# Allegro board KSZ_02v3.brd
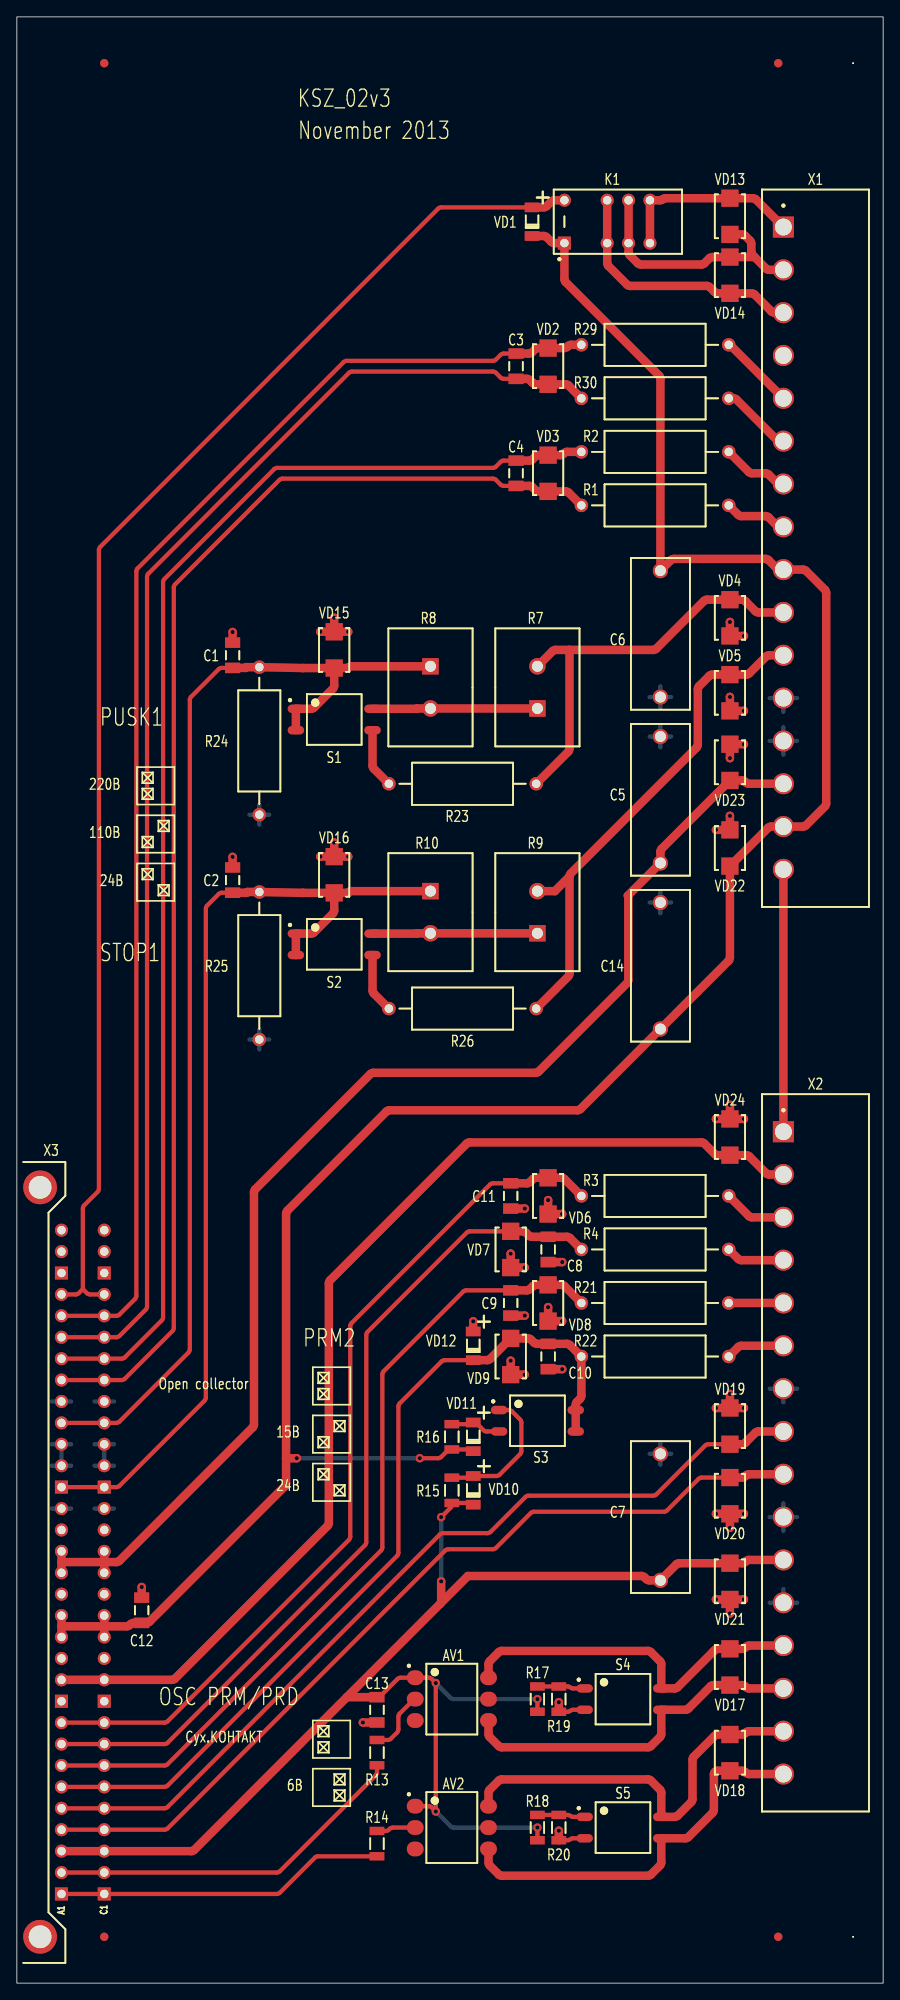
[diagram p0: board, top side]
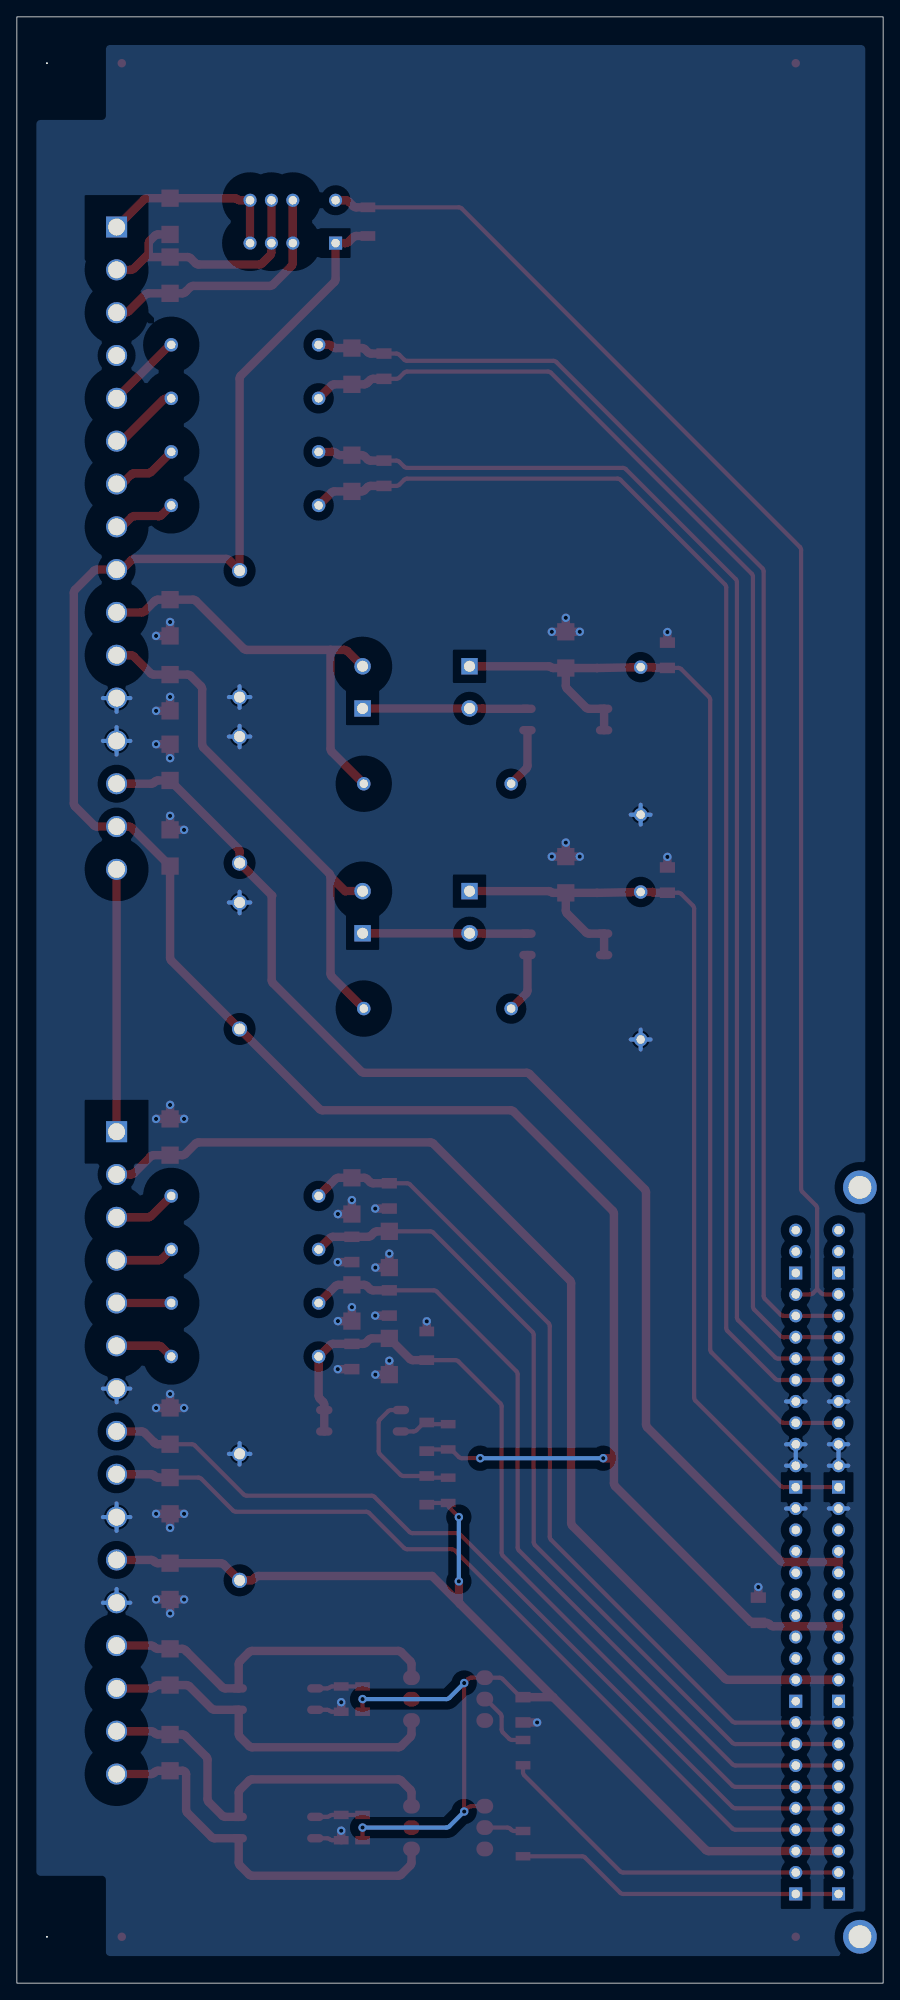
[diagram p1: board, bottom side, seen from below]

Outline 102.87 x 233.25 mm; copper layers: TOP, BOTTOM. Coordinates in mm from the lower left corner of the outline.
Outline path: rectangle 0,0 102.87,233.25

## Design rules (mm)
net group GNDK: nets GNDK
net group OUT: nets 1#RPS_C 1#RPS_NC 1#RPS_NO 1BI+ 1BI- 1MAN2 1MAN+ 1MAN- 1O_PRD+ 1O_PRD- 1O_PRM+ 1O_PRM- 1PRM2 1PUSK1 1PUSK2 1RZ-3 1STOP1 1STOP2

## Placement (name value [footprint] x y rotation side)
AV1  G3VM-351E  [SOIC254P978X342-6N]  51.66 33.69 0 top
AV2  G3VM-351E  [SOIC254P978X342-6N]  51.66 18.45 0 top
C1  0.1u  [CAPC3216X145N]  25.62 157.52 90 top
C2  0.1u  [CAPC3216X145N]  25.62 130.85 90 top
C3  1000p  [CAPC3216X95N]  59.28 191.81 270 top
C4  100p  [CAPC3216X70N]  59.28 179.11 270 top
C5  0.22u  [CAPRR1500W80L1800T700H1250P]  76.42 140.37 90 top
C6  0.22u  [CAPRR1500W80L1800T700H1250P]  76.42 160.06 270 top
C7  0.22u  [CAPRR1500W80L1800T700H1250P]  76.42 55.28 90 top
C8  1000p  [CAPC3216X95N]  63.09 87.03 270 top
C9  1000p  [CAPC3216X95N]  58.64 80.68 270 top
C10  1000p  [CAPC3216X95N]  63.09 74.33 270 top
C11  1000p  [CAPC3216X95N]  58.64 93.38 270 top
C12  0.1u  [CAPC3216X145N]  14.83 44.23 90 top
C13  0.1u  [CAPC3216X145N]  42.77 32.42 270 top
C14  0.22u  [CAPRR1500W80L1800T700H1250P]  76.42 120.69 90 top
K1  FX2  [RELAY_FX2]  71.34 208.95 90 top
NOREF  -  [unnamed]  10.38 5.5 0 top
NOREF#2  -  [unnamed]  90.41 5.5 0 top
NOREF#3  -  [unnamed#2]  99.3 227.75 0 top
NOREF#4  -  [unnamed#2]  99.3 5.5 0 top
NOREF#5  -  [unnamed]  90.41 227.75 0 top
NOREF#6  -  [unnamed]  10.38 227.75 0 top
R1  100k  [RESAD1750W68L12000D500P]  75.79 175.3 0 top
R2  100k  [RESAD1750W68L12000D500P]  75.79 181.65 0 top
R3  1k  [RESAD1750W68L12000D500P]  75.79 93.38 0 top
R4  1k  [RESAD1750W68L12000D500P]  75.79 87.03 0 top
R7  5.1k  [RESV500P1300W900L2500H]  61.82 153.71 90 top
R8  5.1k  [RESV500P1300W900L2500H]  49.12 153.71 270 top
R9  5.1k  [RESV500P1300W900L2500H]  61.82 127.04 90 top
R10  5.1k  [RESV500P1300W900L2500H]  49.12 127.04 270 top
R13  4.7k  [RESC3116X65N]  42.77 27.34 90 top
R14  4.7k  [RESC3116X65N]  42.77 16.55 90 top
R15  2.2k  [RESC3116X65N]  51.66 58.46 90 top
R16  4.7k  [RESC3116X65N]  51.66 64.81 90 top
R17  2.2k  [RESC3116X65N]  61.82 33.69 90 top
R18  2.2k  [RESC3116X65N]  61.82 18.45 90 top
R19  1.5k  [RESC3116X65N]  64.36 33.69 90 top
R20  1.5k  [RESC3116X65N]  64.36 18.45 90 top
R21  1k  [RESAD1750W68L12000D500P]  75.79 80.68 0 top
R22  10  [RESAD1750W68L12000D500P]  75.79 74.33 0 top
R23  430  [RESAD1750W68L12000D500P]  52.93 142.28 0 top
R24  750  [RESAD1750W68L12000D500P]  28.8 147.36 90 top
R25  750  [RESAD1750W68L12000D500P]  28.8 120.69 90 top
R26  430  [RESAD1750W68L12000D500P]  52.93 115.61 0 top
R29  10k  [RESAD1750W68L12000D500P]  75.79 194.35 0 top
R30  10k  [RESAD1750W68L12000D500P]  75.79 188 0 top
S1  SmWDL-02  [SW_SMWDL-02]  37.69 149.9 0 top
S2  SmWDL-02  [SW_SMWDL-02]  37.69 123.23 0 top
S3  SmWDL-02  [SW_SMWDL-02]  61.82 66.71 0 top
S4  SmWDL-02  [SW_SMWDL-02]  71.98 33.69 0 top
S5  SmWDL-02  [SW_SMWDL-02]  71.98 18.45 0 top
VD1  LL4148  [DIOMELF3515N]  61.18 208.95 90 top
VD2  6.8B  [DIOM5236X261N_NP]  63.09 191.81 270 top
VD3  6.8B  [DIOM5236X261N_NP]  63.09 179.11 270 top
VD4  300B  [DIOM5236X261N_NP]  84.68 161.96 270 top
VD5  300B  [DIOM5236X261N_NP]  84.68 153.07 270 top
VD6  30B  [DIOM5236X261N_NP]  63.09 93.38 270 top
VD7  30B  [DIOM5236X261N_NP]  58.64 87.03 270 top
VD8  30B  [DIOM5236X261N_NP]  63.09 80.68 270 top
VD9  30B  [DIOM5236X261N_NP]  58.64 74.33 270 top
VD10  LL4148  [DIOMELF3515N]  54.2 58.46 90 top
VD11  LL4148  [DIOMELF3515N]  54.2 64.81 90 top
VD12  LL4148  [DIOMELF3515N]  54.2 75.6 90 top
VD13  300B  [DIOM5236X261N_NP]  84.68 209.59 270 top
VD14  300B  [DIOM5236X261N_NP]  84.68 202.6 270 top
VD15  30B  [DIOM5236X261N_NP]  37.69 158.15 90 top
VD16  30B  [DIOM5236X261N_NP]  37.69 131.48 90 top
VD17  300B  [DIOM5236X261N_NP]  84.68 37.5 270 top
VD18  300B  [DIOM5236X261N_NP]  84.68 27.34 270 top
VD19  30B  [DIOM5236X261N_NP]  84.68 66.08 90 top
VD20  30B  [DIOM5236X261N_NP]  84.68 57.82 270 top
VD21  30B  [DIOM5236X261N_NP]  84.68 47.66 270 top
VD22  30B  [DIOM5236X261N_NP]  84.68 134.66 90 top
VD23  300B  [DIOM5236X261N_NP]  84.68 144.82 90 top
VD24  300B  [DIOM5236X261N_NP]  84.68 100.37 90 top
X1  231-576/001-000  [WAGO_231_576_001_000]  94.84 170.22 0 top
X2  231-576/001-000  [WAGO_231_576_001_000]  94.84 62.9 0 top
X3  DIN-32x2  [DIN_41612_64_MR]  2.12 49.95 0 top

## Library data of the parts
AV1 AV2 = OPTO_RELAY_1: alternate symbols: (SOIC254P978X342-6M)
C1-C14 = CAP_NP
K1 = RELAY_FX2
R1-R4 R21-R26 R29 R30 = RES_1W: alternate symbols: (RESADV375W68L1200D500P)
R7-R10 = RES_5W
R13-R20 = RES_0.25W
S1-S5 = SWITCH_2
VD1 VD10-VD12 = DIODE
VD2-VD9 VD13-VD24 = DIODE_TVS_BI
X1 X2 = CON_16
X3 = CON_32x2

## Footprints (pads in the part's own frame, mm; a bottom-side part is the same pattern mirrored in y, then rotated)
CAPC3216X70N
  rect 1.25x1.8 smd: 1(-1.5,0) 2(1.5,0)
CAPC3216X95N
  rect 1.25x1.8 smd: 1(-1.5,0) 2(1.5,0)
CAPC3216X145N
  rect 1.25x1.8 smd: 1(-1.5,0) 2(1.5,0)
CAPRR1500W80L1800T700H1250P
  round 1.8 hole 1.3: 1(-7.5,0) 2(7.5,0)
DIN_41612_64_MR
  rect 1.55x1.55 hole 1: A1(3.175,-39.37) A10(3.175,-16.51) A20(3.175,8.89) A30(3.175,34.29) C1(8.255,-39.37) C10(8.255,-16.51) C20(8.255,8.89) C30(8.255,34.29)
  round 1.55 hole 1: A2(3.175,-36.83) A3(3.175,-34.29) A4(3.175,-31.75) A5(3.175,-29.21) A6(3.175,-26.67) A7(3.175,-24.13) A8(3.175,-21.59) A9(3.175,-19.05) A11(3.175,-13.97) A12(3.175,-11.43) A13(3.175,-8.89) A14(3.175,-6.35) A15(3.175,-3.81) A16(3.175,-1.27) A17(3.175,1.27) A18(3.175,3.81) A19(3.175,6.35) A21(3.175,11.43) A22(3.175,13.97) A23(3.175,16.51) A24(3.175,19.05) A25(3.175,21.59) A26(3.175,24.13) A27(3.175,26.67) A28(3.175,29.21) A29(3.175,31.75) A31(3.175,36.83) A32(3.175,39.37) C2(8.255,-36.83) C3(8.255,-34.29) C4(8.255,-31.75) C5(8.255,-29.21) C6(8.255,-26.67) C7(8.255,-24.13) C8(8.255,-21.59) C9(8.255,-19.05) C11(8.255,-13.97) C12(8.255,-11.43) C13(8.255,-8.89) C14(8.255,-6.35) C15(8.255,-3.81) C16(8.255,-1.27) C17(8.255,1.27) C18(8.255,3.81) C19(8.255,6.35) C21(8.255,11.43) C22(8.255,13.97) C23(8.255,16.51) C24(8.255,19.05) C25(8.255,21.59) C26(8.255,24.13) C27(8.255,26.67) C28(8.255,29.21) C29(8.255,31.75) C31(8.255,36.83) C32(8.255,39.37)
  round 4 hole 2.7: HOLE1(0.635,-44.45) HOLE2(0.635,44.45)
DIOM5236X261N_NP
  rect 2.05x2.05 smd: A(2.15,0) C(-2.15,0)
DIOMELF3515N
  rect 1.15x1.75 smd: A(1.7,0) C(-1.7,0)
RELAY_FX2
  rect 1.55x1.55 hole 1: 1(-2.54,6.32)
  round 1.55 hole 1: 3(-2.54,1.24) 4(-2.54,-1.3) 5(-2.54,-3.84) 6(2.54,-3.84) 7(2.54,-1.3) 8(2.54,1.24) 10(2.54,6.32)
RESAD1750W68L12000D500P
  round 1.6 hole 1: 1(-8.75,0) 2(8.75,0)
RESC3116X65N
  rect 1x1.75 smd: 1(-1.5,0) 2(1.5,0)
RESV500P1300W900L2500H
  rect 1.95x1.95 hole 1.3: 1(-2.5,0)
  round 1.95 hole 1.3: 2(2.5,0)
SOIC254P978X342-6N
  oval 2x1.75 smd: 1(-4.35,2.54) 2(-4.35,0) 3(-4.35,-2.54) 4(4.35,-2.54) 5(4.35,0) 6(4.35,2.54)
SW_SMWDL-02
  oval 1.95x1 smd: 1(-4.55,1.27) 2(-4.55,-1.27) 3(4.55,-1.27) 4(4.55,1.27)
unnamed
  round 1 smd: (0,0)
unnamed#2
  round 0.2 hole 2.7 unplated: (0,0)
WAGO_231_576_001_000
  rect 2.5x2.5 hole 2: 1(-3.81,38.1)
  round 2.5 hole 2: 2(-3.81,33.02) 3(-3.81,27.94) 4(-3.81,22.86) 5(-3.81,17.78) 6(-3.81,12.7) 7(-3.81,7.62) 8(-3.81,2.54) 9(-3.81,-2.54) 10(-3.81,-7.62) 11(-3.81,-12.7) 12(-3.81,-17.78) 13(-3.81,-22.86) 14(-3.81,-27.94) 15(-3.81,-33.02) 16(-3.81,-38.1)

## Nets
GNDK: C1.2 C2.2 C5.2 C6.2 C7.2 C8.2 C9.2 C10.2 C11.2 C12.2 C13.2 C14.2 R19.1 R20.1 R24.1 R25.1 S4.2(N) S5.2(N) VD4.A VD5.A VD6.A VD7.A VD8.A VD9.A VD12.A VD15.A VD16.A VD19.A VD20.A VD21.A VD22.A VD23.A VD24.A X1.12 X1.13 X2.7 X2.10 X2.12 X3.A19 X3.A21 X3.A22 X3.A24 X3.C19 X3.C21 X3.C22 X3.C24
1#RPS_C: K1.4(01) K1.7(02) VD13.A VD14.C X1.2
1#RPS_NC: K1.3(NC1) K1.8(NC2) VD14.A X1.3
1#RPS_NO: K1.5(NO1) K1.6(NO2) VD13.C X1.1
1BI+: R29.2 X1.5
1BI-: R30.2 X1.6
1MAN2: R21.2 X2.5
1MAN+: R2.2 X1.7
1MAN-: R1.2 X1.8
1O_PRD+: AV2.6 S5.4(ON) VD18.C X2.15
1O_PRD-: AV2.4 S5.3(ON) VD18.A X2.16
1O_PRM+: AV1.6 S4.4(ON) VD17.C X2.13
1O_PRM-: AV1.4 S4.3(ON) VD17.A X2.14
1PRM2: R22.2 X2.6
1PUSK1: R7.2 R23.2 VD4.C X1.10
1PUSK2: R3.2 X2.3
1RZ-3: X1.16 X2.1
1STOP1: R9.2 R26.2 VD5.C X1.11
1STOP2: R4.2 X2.4
#RPS: K1.10(IN-) VD1.A X3.A29 X3.C29
+15BK: AV1.1 AV2.1 C7.1 C13.1 R15.1 R17.1 R18.1 VD10.C VD21.C X2.11 X3.A3 X3.C3
+24BK: C6.1 C12.1 C14.1 K1.1(IN+) R16.1 VD1.C VD11.C VD22.C X1.9 X1.15 X3.A13 X3.A14 X3.C13 X3.C14
+100BK: C5.1 VD23.C X1.14 X3.A16 X3.A17 X3.C16 X3.C17
+BI: C3.1 R29.1 VD2.C X3.A28 X3.C28
+MAN: C4.1 R2.1 VD3.C X3.A26 X3.C26
+ZPR: VD19.C X2.8 X3.A5 X3.C5
-BI: C3.2 R30.1 VD2.A X3.A27 X3.C27
-MAN: C4.2 R1.1 VD3.A X3.A25 X3.C25
-RZ-2: VD24.C X2.2 X3.A11 X3.C11
-ZPR: VD20.C X2.9 X3.A4 X3.C4
MAN2: C9.1 R21.1 VD8.C X3.A7 X3.C7
O_PRD: R14.1 X3.A1 X3.C1
O_PRM: R13.1 X3.A2 X3.C2
PRM2: C10.1 R22.1 S3.3(ON) S3.4(ON) VD9.C VD12.C X3.A6 X3.C6
PUSK1: C1.1 R8.1 R24.2 S1.1(N) S1.2(N) VD15.C X3.A23 X3.C23
PUSK2: C11.1 R3.1 VD6.C X3.A9 X3.C9
STOP1: C2.1 R10.1 R25.2 S2.1(N) S2.2(N) VD16.C X3.A20 X3.C20
STOP2: C8.1 R4.1 VD7.C X3.A8 X3.C8
N137401: R15.2 S3.1(N) VD10.A
N137413: R16.2 S3.2(N) VD11.A
N139916: AV2.2 R14.2
N144921: R17.2 R19.2 S4.1(N)
N144936: R18.2 R20.2 S5.1(N)
N156407: AV1.2 R13.2
N184066: R7.1 R8.2 S1.4(ON)
N184082: R23.1 S1.3(ON)
N184262: R9.1 R10.2 S2.4(ON)
N184290: R26.1 S2.3(ON)

Pads without a net: AV1 3 5; AV2 3 5; X1 4; X3 A10 A12 A15 A18 A30 A31 A32 C10 C12 C15 C18 C30 C31 C32 HOLE1 HOLE2

## Via types
v1: diameter 1, hole 0.5, TOP to BOTTOM, 53 vias

## Routing (per net, layer and track width the routed paths; a pad name or vN(x,y) marks a point on that pad's centre or on a via; arc(x,y) is an arc through that point)
GNDK: length 158.8
  TOP w0.5: R19.1 65.45,32.19 arc(65.6,32.22) 65.72,32.31 arc(65.85,32.39) 66,32.42 S4.2 ; R20.1 65.45,16.95 arc(65.6,16.98) 65.72,17.07 arc(65.85,17.15) 66,17.18 S5.2
  TOP w1: C2.2 v1(25.62,133.6) ; VD15.A v1(36.03,160.3) ; VD15.A v1(39.35,160.3) ; VD15.A v1(37.69,161.96) ; VD24.A v1(83.02,102.52) ; VD24.A v1(84.68,104.18) ; VD24.A v1(86.34,102.52) ; VD20.A v1(84.68,54.01) ; VD20.A v1(86.34,55.67) ; VD20.A v1(83.02,55.67) ; v1(63.09,92.89) VD6.A v1(64.75,91.23) ; C9.2 v1(60.32,79.18) ; VD12.A v1(54.2,78.51) ; VD19.A v1(86.34,68.23) ; VD19.A v1(83.02,68.23) ; VD19.A v1(84.68,69.89) ; VD16.A v1(39.35,133.63) ; VD16.A v1(36.03,133.63) ; VD16.A v1(37.69,135.29) ; C1.2 v1(25.62,160.27) ; v1(60.3,72.18) VD9.A v1(58.64,73.84) ; v1(83.02,136.81) 84.68,136.81 v1(84.68,138.47) ; v1(84.68,161.47) VD4.A v1(86.34,159.81) ; v1(64.36,33.32) R19.1 ; v1(84.68,152.58) VD5.A v1(86.34,150.92) ; C11.2 v1(60.32,91.88) ; v1(64.75,78.53) VD8.A v1(63.09,80.19) ; VD21.A v1(86.34,45.51) ; VD21.A v1(84.68,43.85) ; VD21.A v1(83.02,45.51) ; C10.2 v1(64.76,72.83) ; v1(60.3,84.88) VD7.A v1(58.64,86.54) ; v1(84.68,145.32) VD23.A v1(86.34,146.97) ; C12.2 v1(14.83,46.99) ; C13.2 v1(41.09,30.92) ; C8.2 v1(64.76,85.53) ; v1(64.36,18.08) R20.1
  BOTTOM w0.5: 10.38,61.38 10.38,62.53 ; 10.38,61.38 9.23,61.38 ; 10.38,61.38 11.53,61.38 ; 9.23,69 11.53,69 ; 76.42,61.51 C7.2 ; C7.2 77.7,62.78 ; C7.2 76.42,64.06 ; C7.2 75.14,62.78 ; C14.2 77.7,128.19 ; C14.2 76.42,126.91 ; C14.2 76.42,129.47 ; C14.2 75.14,128.19 ; 91.03,145.73 91.03,147.36 ; 91.03,147.36 92.65,147.36 ; 91.03,147.36 89.4,147.36 ; 91.03,147.36 91.03,148.99 ; 75.14,147.87 C5.2 ; C5.2 77.7,147.87 ; C5.2 76.42,149.15 ; C5.2 76.42,146.6 ; 11.53,56.3 9.23,56.3 ; 9.23,63.92 10.38,63.92 ; 10.38,63.92 10.38,62.77 ; 10.38,63.92 11.53,63.92 ; 89.4,70.52 X2.7 ; X2.7 91.03,68.9 ; X2.7 92.65,70.52 ; 5.3,63.92 6.45,63.92 ; 5.3,63.92 5.3,62.77 ; 5.3,63.92 4.15,63.92 ; R25.1 28.8,113.12 ; R25.1 27.62,111.94 ; R25.1 28.8,110.76 ; R25.1 29.97,111.94 ; 5.3,61.38 5.3,62.53 ; 5.3,61.38 4.15,61.38 ; 5.3,61.38 6.45,61.38 ; 89.4,152.44 91.03,152.44 ; 91.03,152.44 92.65,152.44 ; 91.03,152.44 91.03,150.81 ; 76.42,151.28 C6.2 ; C6.2 76.42,153.84 ; C6.2 75.14,152.56 ; C6.2 77.7,152.56 ; 6.45,69 4.15,69 ; X2.12 91.03,46.75 ; X2.12 89.4,45.12 ; X2.12 92.65,45.12 ; 91.03,53.66 X2.10 ; X2.10 91.03,56.91 ; X2.10 89.4,55.28 ; X2.10 92.65,55.28 ; R24.1 29.97,138.61 ; R24.1 27.62,138.61 ; R24.1 28.8,137.43 ; R24.1 28.8,139.79 ; 4.15,56.3 6.45,56.3
1#RPS_C: length 31
  TOP w1: X1.2 89.33,203.24 arc(89.14,203.28) 88.97,203.38 87.61,204.75 ; 87.61,204.75 VD14.C 82.59,204.75 arc(82.4,204.72) 82.23,204.61 81.65,204.02 arc(81.48,203.91) 81.29,203.87 74.09,203.87 arc(73.9,203.91) 73.73,204.02 72.79,204.97 arc(72.68,205.13) 72.64,205.32 K1.4 K1.7 ; 87.61,204.75 87.36,205 arc(87.25,205.16) 87.22,205.35 87.22,206.34 arc(87.18,206.54) 87.07,206.7 86.47,207.29 arc(86.31,207.4) 86.12,207.44 VD13.A
1#RPS_NC: length 30.8
  TOP w1: K1.8 K1.3 70.1,204.05 arc(70.14,203.86) 70.25,203.7 72.46,201.48 arc(72.63,201.37) 72.82,201.33 81.93,201.33 arc(82.12,201.3) 82.28,201.19 82.77,200.7 82.78,200.7 82.9,200.58 arc(83.04,200.49) 83.2,200.45 VD14.A 87.25,200.45 arc(87.44,200.42) 87.61,200.31 89.61,198.31 arc(89.77,198.2) 89.96,198.16 X1.3
1#RPS_NO: length 22.4
  TOP w1: K1.5 K1.6 76.41,211.49 arc(76.57,211.53) 76.7,211.62 arc(76.84,211.71) 77,211.74 VD13.C 87.4,211.74 arc(87.59,211.7) 87.75,211.59 X1.1
1BI+: length 9.1
  TOP w1: X1.5 84.77,194.25 arc(84.66,194.32) R29.2
1BI-: length 8.6
  TOP w1: R30.2 85.1,188 arc(85.29,187.96) 85.46,187.85 90.24,183.06 arc(90.41,182.96) 90.6,182.92 91.03,182.92
1MAN2: length 6.5
  TOP w1: X2.5 R21.2
1MAN+: length 8
  TOP w1: R2.2 86.93,179.25 arc(87.09,179.15) 87.28,179.11 88.91,179.11 arc(89.1,179.07) 89.27,178.96 90.24,177.99 arc(90.41,177.88) 90.6,177.84 X1.7
1MAN-: length 7.5
  TOP w1: 91.03,172.76 90.6,172.76 arc(90.41,172.8) 90.24,172.91 89.27,173.88 arc(89.1,173.99) 88.91,174.03 86.01,174.03 arc(85.82,174.07) 85.66,174.18 R1.2
1O_PRD+: length 48
  TOP w1: X2.15 86.93,29.88 arc(86.73,29.85) 86.57,29.74 86.47,29.64 arc(86.31,29.53) 86.12,29.49 VD18.C 83.22,29.49 arc(83.03,29.46) 82.87,29.35 80.38,26.85 arc(80.27,26.69) 80.23,26.5 80.23,21.84 arc(80.19,21.65) 80.08,21.48 78.47,19.87 arc(78.31,19.76) 78.12,19.72 S5.4 76.53,22.59 arc(76.49,22.78) 76.38,22.94 75.3,24.02 arc(75.13,24.13) 74.94,24.17 57.58,24.17 arc(57.39,24.13) 57.22,24.02 56.15,22.95 arc(56.04,22.79) 56.01,22.6 AV2.6
1O_PRD-: length 47
  TOP w1: X2.16 86.93,24.8 arc(86.73,24.84) 86.57,24.95 86.47,25.05 arc(86.31,25.16) 86.12,25.19 VD18.A 83.16,25.19 arc(82.88,25.08) 82.77,24.8 82.77,20.57 arc(82.73,20.37) 82.62,20.21 79.74,17.33 arc(79.58,17.22) 79.39,17.18 S5.3 76.53,14.32 arc(76.49,14.13) 76.38,13.97 75.3,12.88 arc(75.13,12.78) 74.94,12.74 57.58,12.74 arc(57.39,12.78) 57.22,12.88 56.15,13.96 arc(56.04,14.12) 56.01,14.31 AV2.4
1O_PRM+: length 43
  TOP w1: AV1.6 56.01,37.84 arc(56.04,38.03) 56.15,38.19 57.22,39.26 arc(57.39,39.37) 57.58,39.41 74.94,39.41 arc(75.13,39.37) 75.3,39.26 76.38,38.18 arc(76.49,38.02) 76.53,37.83 S4.4 78.12,34.96 arc(78.31,35) 78.47,35.11 82.7,39.34 82.71,39.34 82.88,39.51 arc(83.04,39.62) 83.23,39.65 VD17.C 86.12,39.65 arc(86.31,39.69) 86.47,39.8 86.57,39.9 arc(86.73,40.01) 86.93,40.04 X2.13
1O_PRM-: length 42.2
  TOP w1: X2.14 86.93,34.96 arc(86.73,35) 86.57,35.11 86.47,35.21 arc(86.31,35.32) 86.12,35.35 VD17.A 82.73,35.35 arc(82.54,35.32) 82.38,35.21 79.74,32.57 arc(79.58,32.46) 79.39,32.42 S4.3 76.53,29.56 arc(76.49,29.37) 76.38,29.21 75.3,28.12 arc(75.13,28.02) 74.94,27.98 57.58,27.98 arc(57.39,28.02) 57.22,28.12 56.15,29.2 arc(56.04,29.36) 56.01,29.55 AV1.4
1PRM2: length 7
  TOP w1: X2.6 86.01,75.6 arc(85.82,75.57) 85.66,75.46 R22.2
1PUSK1: length 50.5
  TOP w1: 65.62,158.15 75.58,158.15 arc(75.77,158.19) 75.93,158.3 81.6,163.97 arc(81.76,164.08) 81.95,164.11 VD4.C 86.16,164.11 arc(86.31,164.08) 86.45,163.99 86.57,163.87 86.58,163.87 87.7,162.75 arc(87.87,162.64) 88.06,162.6 X1.10 ; 65.62,158.15 65.62,146.44 arc(65.59,146.24) 65.48,146.08 R23.2 ; 65.62,158.15 63.97,158.15 arc(63.78,158.12) 63.61,158.01 R7.2
1PUSK2: length 7.5
  TOP w1: R3.2 86.93,90.99 arc(87.09,90.88) 87.28,90.84 X2.3
1RZ-3: length 31.1
  TOP w1: X1.16 X2.1
1STOP1: length 62.2
  TOP w1: R26.2 65.48,119.41 arc(65.59,119.57) 65.62,119.77 65.62,131.28 ; 65.62,131.28 63.89,129.54 R9.2 ; 65.62,131.28 arc(65.66,131.47) 65.77,131.63 80.72,146.58 arc(80.83,146.74) 80.87,146.93 80.87,153.5 arc(80.9,153.69) 81.01,153.85 82.23,155.08 arc(82.4,155.19) 82.59,155.22 VD5.C 86.62,155.22 arc(86.81,155.26) 86.97,155.37 88.97,157.37 arc(89.14,157.48) 89.33,157.52 X1.11
1STOP2: length 7
  TOP w1: R4.2 85.66,85.91 arc(85.82,85.8) 86.01,85.76 X2.4
#RPS: length 166.5
  TOP w0.5: 10.38,81.7 8.68,81.7 arc(8.49,81.74) 8.33,81.85 7.84,82.33 ; 5.3,81.7 7,81.7 arc(7.19,81.74) 7.35,81.85 7.84,82.33 ; 7.84,82.33 7.84,91.91 arc(7.88,92.1) 7.99,92.26 9.6,93.87 arc(9.71,94.04) 9.75,94.23 9.75,170.01 arc(9.78,170.2) 9.89,170.37 50.03,210.51 arc(50.2,210.62) 50.39,210.65 VD1.A
  TOP w1: K1.10 63.83,211.49 arc(63.63,211.46) 63.47,211.35 62.92,210.8 arc(62.76,210.69) 62.57,210.65 VD1.A
+15BK: length 173.8
  TOP w0.5: R17.1 v1(61.82,33.69) ; AV2.1 48.91,20.99 arc(49.1,20.96) 49.26,20.85 v1(49.75,20.36) v1(49.75,35.6) 49.26,36.09 arc(49.1,36.2) 48.91,36.23 AV1.1 45.56,36.23 arc(45.37,36.2) 45.2,36.09 43.19,34.07 arc(43.02,33.96) 42.83,33.92 C13.1 ; v1(50.39,55.28) 51.51,56.41 arc(51.62,56.57) 51.66,56.76 R15.1 53.79,56.96 arc(53.98,56.92) 54.14,56.81 VD10.C ; R18.1 v1(61.82,18.45)
  TOP w1: 39.19,33.92 21.07,15.81 arc(20.9,15.7) 20.71,15.66 5.3,15.66 ; 39.19,33.92 C13.1 ; 39.19,33.92 50.24,44.98 ; 50.24,44.98 53.56,48.3 74.17,48.3 arc(74.36,48.26) 74.52,48.15 74.75,47.93 arc(74.91,47.82) 75.1,47.78 C7.1 78.3,49.67 arc(78.47,49.78) 78.66,49.81 VD21.C 86.12,49.81 arc(86.31,49.85) 86.47,49.96 86.57,50.06 arc(86.73,50.17) 86.93,50.2 X2.11 ; 50.24,44.98 arc(50.35,45.14) 50.39,45.33 v1(50.39,47.66)
  BOTTOM w0.5: v1(61.82,33.69) 51.86,33.69 arc(51.67,33.73) 51.51,33.84 v1(49.75,35.6) ; v1(61.82,18.45) 51.86,18.45 arc(51.67,18.49) 51.51,18.6 v1(49.75,20.36) ; v1(50.39,55.28) v1(50.39,47.66)
+24BK: length 278.9
  TOP w0.5: v1(47.85,62.27) 50.03,62.27 arc(50.22,62.31) 50.39,62.41 51.13,63.16 arc(51.3,63.27) 51.49,63.31 R16.1 53.79,63.31 arc(53.98,63.27) 54.14,63.16 VD11.C
  TOP w1: 10.38,42.33 13.05,42.33 arc(13.24,42.37) 13.4,42.48 13.52,42.59 arc(13.68,42.7) 13.87,42.73 C12.1 15.4,42.73 arc(15.59,42.77) 15.76,42.88 31.82,58.95 arc(31.93,59.11) 31.97,59.3 31.97,62.27 ; 10.38,42.33 10.38,41.06 ; 10.38,42.33 5.3,42.33 ; 10.38,42.33 10.38,43.6 ; 31.97,62.27 31.97,91.27 arc(32.01,91.46) 32.12,91.62 43.89,103.4 arc(44.05,103.51) 44.24,103.54 66.57,103.54 arc(66.76,103.58) 66.92,103.69 C14.1 84.53,121.3 arc(84.64,121.46) 84.68,121.65 VD22.C 89.22,137.05 arc(89.38,137.16) 89.57,137.2 93.36,137.2 arc(93.55,137.24) 93.71,137.34 95.96,139.59 arc(96.07,139.75) 96.11,139.95 96.11,164.93 arc(96.07,165.12) 95.96,165.28 93.71,167.53 arc(93.55,167.64) 93.36,167.68 X1.9 90.6,167.68 arc(90.41,167.72) 90.24,167.82 89.27,168.8 arc(89.1,168.91) 88.91,168.95 78.02,168.95 arc(77.83,168.91) 77.66,168.8 C6.1 76.42,190.33 arc(76.38,190.52) 76.27,190.69 65.17,201.79 arc(65.06,201.95) 65.02,202.15 K1.1 63.82,206.41 arc(63.63,206.45) 63.47,206.56 62.92,207.11 arc(62.76,207.22) 62.57,207.25 VD1.C ; 31.97,62.27 v1(33.24,62.27) ; 5.3,42.33 5.3,41.06 ; 5.3,42.33 5.3,43.6
  BOTTOM w0.5: v1(33.24,62.27) v1(47.85,62.27)
+100BK: length 152.5
  TOP w1: 10.38,49.95 10.38,48.68 ; 10.38,49.95 11.82,49.95 arc(12.01,49.99) 12.18,50.1 28.01,65.93 arc(28.12,66.09) 28.16,66.29 28.16,93.81 arc(28.2,94) 28.31,94.17 41.98,107.84 arc(42.15,107.95) 42.34,107.99 61.61,107.99 arc(61.8,108.03) 61.96,108.14 72.46,118.64 arc(72.57,118.8) 72.61,118.99 72.61,128.94 72.55,129 C5.1 76.42,134.21 arc(76.46,134.4) 76.57,134.56 VD23.C 86.12,142.67 arc(86.31,142.63) 86.47,142.52 86.57,142.42 arc(86.73,142.32) 86.93,142.28 X1.14 ; 10.38,49.95 10.38,51.22 ; 10.38,49.95 5.3,49.95 ; 5.3,51.22 5.3,49.95 ; 5.3,49.95 5.3,48.68
+BI: length 159.8
  TOP w0.5: C3.1 57.81,193.31 arc(57.62,193.27) 57.45,193.16 56.88,192.59 arc(56.72,192.48) 56.53,192.44 39.16,192.44 arc(38.97,192.41) 38.81,192.3 14.34,167.82 arc(14.23,167.66) 14.19,167.47 14.19,81.53 arc(14.15,81.34) 14.04,81.17 12.18,79.31 arc(12.02,79.2) 11.82,79.16 5.3,79.16
  TOP w1: C3.1 60.82,193.31 arc(61.01,193.35) 61.17,193.46 61.53,193.81 arc(61.69,193.92) 61.89,193.96 VD2.C 65.01,193.96 arc(65.2,194) 65.36,194.1 65.46,194.2 arc(65.62,194.31) 65.81,194.35 R29.1
+MAN: length 157.4
  TOP w0.5: 5.3,74.08 12.46,74.08 arc(12.65,74.12) 12.81,74.23 17.22,78.63 arc(17.33,78.79) 17.37,78.99 17.37,166.2 arc(17.4,166.39) 17.51,166.56 30.55,179.6 arc(30.72,179.71) 30.91,179.74 56.53,179.74 arc(56.72,179.78) 56.88,179.89 57.45,180.46 arc(57.62,180.57) 57.81,180.61 C4.1
  TOP w1: C4.1 60.88,180.61 arc(61.07,180.65) 61.23,180.75 61.59,181.11 arc(61.75,181.22) 61.94,181.26 VD3.C 64.53,181.26 arc(64.72,181.3) 64.88,181.41 64.98,181.5 arc(65.14,181.61) 65.34,181.65 R2.1
+ZPR: length 104.1
  TOP w0.5: 5.3,20.74 17.54,20.74 arc(17.73,20.78) 17.89,20.89 50.24,53.23 arc(50.4,53.34) 50.59,53.38 55.89,53.38 arc(56.08,53.42) 56.25,53.52 60.4,57.68 arc(60.56,57.79) 60.75,57.82 75.58,57.82 arc(75.77,57.86) 75.93,57.97 81.74,63.78 arc(81.91,63.89) 82.1,63.93 VD19.C
  TOP w1: VD19.C 86.16,63.93 arc(86.31,63.96) 86.45,64.05 86.57,64.17 86.58,64.17 87.7,65.3 arc(87.87,65.41) 88.06,65.44 X2.8
-BI: length 161.3
  TOP w0.5: 5.3,76.62 11.82,76.62 arc(12.01,76.66) 12.18,76.77 15.31,79.9 arc(15.42,80.06) 15.46,80.26 15.46,166.84 arc(15.5,167.03) 15.61,167.19 39.44,191.03 arc(39.61,191.14) 39.8,191.17 56.53,191.17 arc(56.72,191.14) 56.88,191.03 57.45,190.46 arc(57.62,190.35) 57.81,190.31 C3.2
  TOP w1: R30.1 65.52,189.51 arc(65.36,189.62) 65.17,189.66 VD2.A 61.61,189.66 arc(61.45,189.69) 61.31,189.78 61.19,189.9 61.18,189.9 60.92,190.16 arc(60.76,190.27) 60.57,190.31 C3.2
-MAN: length 158.9
  TOP w0.5: 5.3,71.54 12.46,71.54 arc(12.65,71.58) 12.81,71.69 18.49,77.36 arc(18.6,77.52) 18.64,77.72 18.64,165.57 arc(18.67,165.76) 18.78,165.92 31.19,178.33 arc(31.35,178.44) 31.54,178.47 56.53,178.47 arc(56.72,178.44) 56.88,178.33 57.45,177.75 arc(57.62,177.65) 57.81,177.61 C4.2
  TOP w1: C4.2 60.88,177.61 arc(61.07,177.57) 61.23,177.46 61.59,177.1 arc(61.75,177) 61.94,176.96 VD3.A 65.17,176.96 arc(65.36,176.92) 65.52,176.81 R1.1
-RZ-2: length 130.4
  TOP w1: X2.2 89.33,95.92 arc(89.14,95.96) 88.97,96.07 86.97,98.07 arc(86.81,98.18) 86.62,98.22 83.22,98.22 arc(83.03,98.26) 82.87,98.37 81.65,99.59 arc(81.48,99.7) 81.29,99.73 53.77,99.73 arc(53.58,99.7) 53.41,99.59 37.2,83.37 arc(37.09,83.21) 37.05,83.02 37.05,54.6 arc(37.01,54.41) 36.9,54.25 18.78,36.13 arc(18.62,36.02) 18.43,35.98 5.3,35.98
-ZPR: length 103
  TOP w0.5: 5.3,18.2 17.54,18.2 arc(17.73,18.24) 17.89,18.35 50.87,51.33 arc(51.04,51.44) 51.23,51.47 56.53,51.47 arc(56.72,51.51) 56.88,51.62 61.03,55.77 arc(61.2,55.88) 61.39,55.92 76.85,55.92 arc(77.04,55.96) 77.2,56.06 80.96,59.83 arc(81.13,59.94) 81.32,59.97 VD20.C
  TOP w1: VD20.C 86.12,59.97 arc(86.31,60.01) 86.47,60.12 86.57,60.22 arc(86.73,60.33) 86.93,60.36 X2.9
MAN2: length 98.4
  TOP w0.5: C9.1 53.36,82.18 arc(53.17,82.15) 53.01,82.04 43.55,72.58 arc(43.44,72.41) 43.4,72.22 43.4,51.68 arc(43.36,51.49) 43.25,51.33 17.89,25.97 arc(17.73,25.86) 17.54,25.82 5.3,25.82
  TOP w1: C9.1 60.58,82.18 arc(60.77,82.22) 60.93,82.33 61.29,82.69 arc(61.45,82.8) 61.64,82.83 VD8.C 64.68,82.83 arc(64.87,82.8) 65.03,82.69 R21.1
O_PRD: length 39.3
  TOP w0.5: 5.3,10.58 30.87,10.58 arc(31.06,10.62) 31.23,10.73 35.4,14.9 arc(35.57,15.01) 35.76,15.05 R14.1
O_PRM: length 43.3
  TOP w0.5: 5.3,13.12 30.87,13.12 arc(31.06,13.16) 31.23,13.27 42.62,24.66 arc(42.73,24.82) 42.77,25.01 R13.1
PRM2: length 104
  TOP w0.5: VD12.C 50.8,73.9 arc(50.61,73.87) 50.44,73.76 45.45,68.77 arc(45.34,68.6) 45.31,68.41 45.31,51.05 arc(45.27,50.85) 45.16,50.69 17.89,23.43 arc(17.73,23.32) 17.54,23.28 5.3,23.28
  TOP w1: VD12.C 55.85,73.9 arc(56.04,73.94) 56.21,74.05 VD9.C 60.7,76.48 arc(60.89,76.45) 61.05,76.34 61.41,75.98 arc(61.57,75.87) 61.76,75.83 C10.1 65.33,75.83 arc(65.52,75.8) 65.68,75.69 R22.1 67.04,69.69 arc(67,69.5) 66.89,69.34 66.51,68.96 arc(66.4,68.8) 66.37,68.61 S3.4 S3.3
PUSK1: length 136.7
  TOP w0.5: 5.3,66.46 11.82,66.46 arc(12.01,66.5) 12.18,66.61 20.39,74.82 arc(20.5,74.98) 20.54,75.18 20.54,152.23 arc(20.58,152.42) 20.69,152.59 23.97,155.87 arc(24.14,155.98) 24.33,156.02 C1.1
  TOP w1: S1.2 S1.1 34.94,151.17 arc(35.13,151.21) 35.29,151.31 37.54,153.56 arc(37.65,153.73) 37.69,153.92 VD15.C ; VD15.C 39.19,156 arc(39.33,156.03) 39.44,156.11 arc(39.55,156.18) 39.69,156.21 R8.1 ; VD15.C 33.99,156 arc(33.98,156) 33.98,156 R24.2 27.24,156.11 27.15,156.02 C1.1
PUSK2: length 104.1
  TOP w0.5: C11.1 56.54,94.88 arc(56.35,94.85) 56.18,94.74 39.74,78.29 arc(39.63,78.13) 39.59,77.94 39.59,52.95 arc(39.55,52.76) 39.44,52.6 17.89,31.05 arc(17.73,30.94) 17.54,30.9 5.3,30.9
  TOP w1: R3.1 65.03,95.39 arc(64.87,95.5) 64.68,95.53 VD6.C 61.64,95.53 arc(61.45,95.5) 61.29,95.39 60.93,95.03 arc(60.77,94.92) 60.58,94.88 C11.1
STOP1: length 117.6
  TOP w0.5: 5.3,58.84 11.82,58.84 arc(12.01,58.88) 12.18,58.99 22.3,69.11 arc(22.41,69.27) 22.45,69.46 22.45,127.47 arc(22.48,127.66) 22.59,127.82 23.97,129.2 arc(24.14,129.31) 24.33,129.35 C2.1
  TOP w1: C2.1 27.28,129.35 27.37,129.44 R25.2 33.98,129.33 arc(33.98,129.33) 33.99,129.33 VD16.C ; VD16.C 37.69,127.25 arc(37.65,127.05) 37.54,126.89 35.29,124.64 arc(35.13,124.54) 34.94,124.5 S2.1 S2.2 ; VD16.C 39.19,129.33 arc(39.33,129.36) 39.44,129.44 arc(39.55,129.51) 39.69,129.54 R10.1
STOP2: length 102.3
  TOP w0.5: VD7.C 53.78,89.18 arc(53.59,89.15) 53.43,89.04 41.64,77.25 arc(41.53,77.09) 41.5,76.9 41.5,52.32 arc(41.46,52.12) 41.35,51.96 17.89,28.51 arc(17.73,28.4) 17.54,28.36 5.3,28.36
  TOP w1: R4.1 65.68,88.39 arc(65.52,88.5) 65.33,88.53 C8.1 61.15,88.53 arc(60.96,88.57) 60.8,88.68 60.44,89.04 arc(60.28,89.15) 60.09,89.18 VD7.C
N137401: length 16.3
  TOP w0.5: R15.2 53.79,59.96 arc(53.98,60) 54.14,60.11 VD10.A 56.96,60.16 arc(57.15,60.2) 57.31,60.3 59.76,62.76 arc(59.87,62.92) 59.91,63.11 59.91,66.51 arc(59.87,66.7) 59.76,66.86 58.79,67.84 arc(58.62,67.95) 58.43,67.98 S3.1
N137413: length 6.1
  TOP w0.5: R16.2 53.79,66.31 arc(53.98,66.35) 54.14,66.45 54.2,66.51 54.29,66.51 arc(54.48,66.47) 54.64,66.36 55.41,65.59 arc(55.58,65.48) 55.77,65.44 S3.2
N139916: length 4.7
  TOP w0.5: AV2.2 44.63,18.45 arc(44.44,18.42) 44.28,18.31 44.16,18.2 arc(44,18.09) 43.81,18.05 R14.2
N144921: length 5.7
  TOP w0.5: S4.1 66,34.96 arc(65.85,34.99) 65.72,35.08 arc(65.6,35.16) 65.45,35.19 R19.2 R17.2
N144936: length 5.7
  TOP w0.5: S5.1 66,19.72 arc(65.85,19.75) 65.72,19.84 arc(65.6,19.92) 65.45,19.95 R20.2 R18.2
N156407: length 7.6
  TOP w0.5: R13.2 44.06,28.84 arc(44.25,28.88) 44.41,28.99 45.16,29.74 arc(45.27,29.9) 45.31,30.09 45.31,31.61 arc(45.34,31.8) 45.45,31.96 47.09,33.61 arc(47.19,33.67) AV1.2
N184066: length 19.6
  TOP w1: S1.4 47.47,151.17 47.51,151.21 R8.2 R7.1
N184082: length 7.1
  TOP w1: S1.3 42.24,144.43 arc(42.27,144.23) 42.38,144.07 R23.1
N184262: length 19.6
  TOP w1: S2.4 47.47,124.5 47.51,124.54 R10.2 R9.1
N184290: length 7.1
  TOP w1: R26.1 42.38,117.4 arc(42.27,117.56) 42.24,117.76 S2.3

## Copper pours and planes (outline as drawn; the poured copper is in the pictures)
GNDK on BOTTOM: 2.12,3.71 2.27,3.36 2.62,3.21 91.8,3.21 92.15,3.36 92.3,3.71 92.3,12.24 92.44,12.59 92.8,12.74 100.05,12.74 100.4,12.89 100.55,13.24 100.55,220.52 100.4,220.87 100.05,221.02 92.8,221.02 92.44,221.17 92.3,221.52 92.3,229.41 92.15,229.76 91.8,229.91 2.62,229.91 2.27,229.76 2.12,229.41 ; 1 cut-out

## Text on the board
Ref Des/Silkscreen Top: 220B | 110B | 24B | Open collector | Cyx.KOHTAKT | 15B | 6B | PUSK1 | STOP1 | OSC PRM/PRD | KSZ_02v3 | November 2013 | PRM2
DISPLAY_TOP: KSZ_02v3 | November 2013
User.6: FIGURE | SIZE | 0.5 | 1.0 | 1.3 | 2.0 | 2.7 | DRILL CHART: TOP to BOTTOM | ALL UNITS ARE IN MILLIMETERS | PLATED | NON-PLATED | QTY | 53 | 96 | 16 | 30 | 2
